# EAGLE board schema_carte_US (EAGLE 6.4)
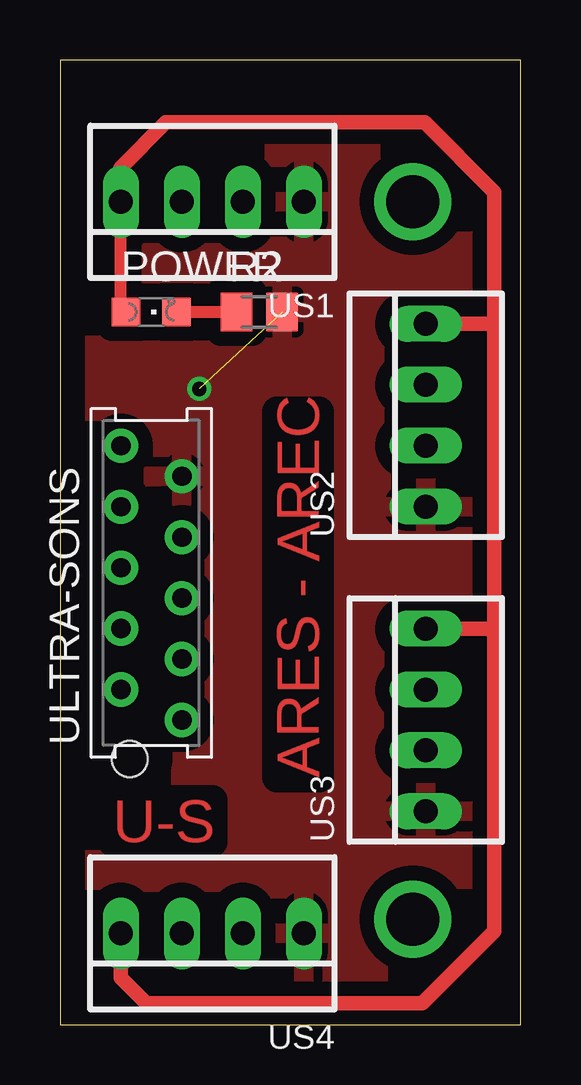
[diagram p0: board, top side]
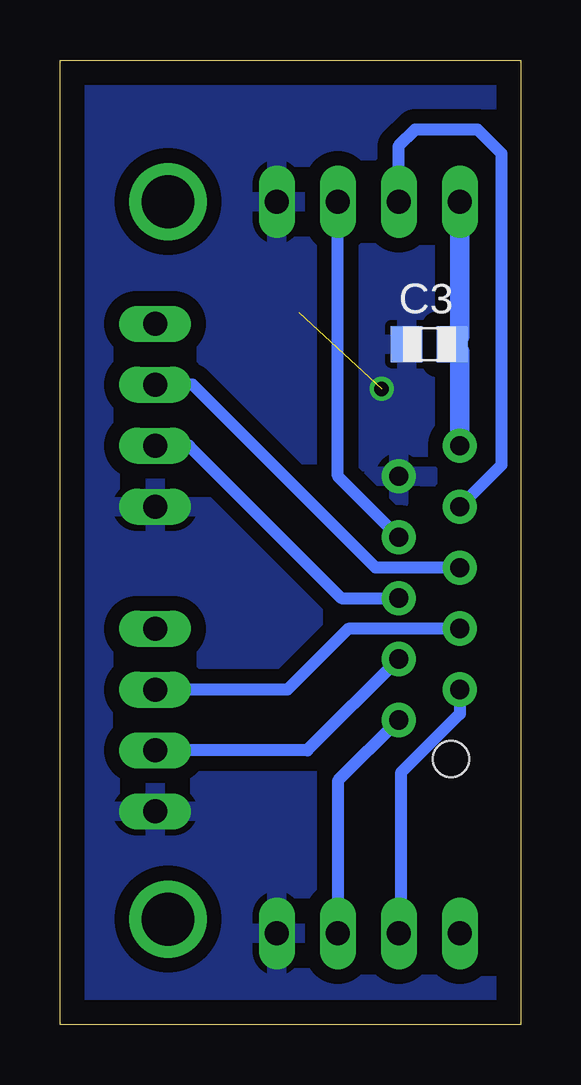
[diagram p1: board, bottom side, seen from below]

Size 19.2 x 40.2 mm. Coordinates in mm from the lower left corner, seen from the top.
Outline: 0,0 19.2,0 19.2,40.2 0,40.2 0,0
Copper layers (1*16): Top 0.035mm / dielectric 1.5mm / Bottom 0.035mm
Design rules "default": minimum track width 10mil, minimum drill 24mil, track to track 8mil, track to pad 8mil, pad to pad 8mil, via to via 8mil, smd to smd 8mil, copper to edge 40mil, drill to drill 8mil, minimum pad ring 10mil, minimum via ring 8mil, stop-mask expansion 4mil, vias tented up to drill 0mil, thermal gap 10mil

## Footprints (pad centres in the part's own frame; a part is rotated, then mirrored left to right if it is on the bottom)
C0805 = smd 1.3 x 1.5: 1 -0.95,0; 2 0.95,0
CHIPLED_0805 = smd 1.2 x 1.2: A 0,-1.05; C 0,1.05
M0805 = smd 1.3 x 1.6: 1 -0.95,0; 2 0.95,0
AMP-215079-10 = drill 0.8 pad 1.422: 1 0,-1.27; 2 1.27,1.27; 3 2.54,-1.27; 4 3.81,1.27; 5 5.08,-1.27; 6 6.35,1.27; 7 7.62,-1.27; 8 8.89,1.27; 9 10.16,-1.27; 10 11.43,1.27 | hole 1.5: -1.62,0.905
22-23-2041 = drill 1 long: 1 -3.81,0; 2 -1.27,0; 3 1.27,0; 4 3.81,0

## Placement (x,y rotation side)
C3  100nF  [C0805]  3.81,28.36 0 bottom
POWER  [CHIPLED_0805]  3.8,29.7 270 top
R2  1k  [M0805]  8.3,29.7 0 top
ULTRA-SONS  [AMP-215079-10]  3.81,12.7 90 top
US1  22-23-2041  [22-23-2041]  6.35,34.29 180 top
US2  22-23-2041  [22-23-2041]  15.24,25.4 90 top
US3  22-23-2041  [22-23-2041]  15.24,12.7 90 top
US4  22-23-2041  [22-23-2041]  6.35,3.81 180 top

## Library data of the parts
C3 R2 = rcl
POWER = led
ULTRA-SONS = jt-con-micromatch
US1-US4 = con-molex; MF: MOLEX; MPN: 22-23-2041; OC_FARNELL: 1462920; OC_NEWARK: 38C0355

## Nets
+5V: C3.2 POWER.A ULTRA-SONS.10 US1.4 US2.4 US3.4 US4.4
E1: ULTRA-SONS.7 US1.2
E2: ULTRA-SONS.5 US2.2
E3: ULTRA-SONS.3 US3.2
E4: ULTRA-SONS.1 US4.2
GND: C3.1 R2.2 ULTRA-SONS.9 US1.1 US2.1 US3.1 US4.1
N$2: POWER.C R2.1
T1: ULTRA-SONS.8 US1.3
T2: ULTRA-SONS.6 US2.3
T3: ULTRA-SONS.4 US3.3
T4: ULTRA-SONS.2 US4.3

## Tracks (layer width: path | path; a pad name or v marks a point on that pad's centre or on a via)
+5V
  Top 0.5: POWER.A 2.54,29.7 US1.4
  Top 0.6: US4.4 2.54,1.96 3.6,0.9 15.1,0.9 18.1,3.9 18.1,16.3 | 18.1,16.3 18.1,29.2 | 18.1,29.2 18.1,34.7 15.2,37.6 4.4,37.6 2.5,35.7 2.5,34.33 US1.4 | US2.4 18.09,29.21 18.1,29.2 | US3.4 17.89,16.51 18.1,16.3
  Bottom 0.813: ULTRA-SONS.10 2.54,28.04 C3.2 2.54,28.68 US1.4
E1
  Bottom 0.5: ULTRA-SONS.7 7.62,22.86 US1.2
E2
  Bottom 0.5: US2.2 13.83,24.13 7.48,17.78 ULTRA-SONS.5
E3
  Bottom 0.5: ULTRA-SONS.3 8.89,11.43 US3.2
E4
  Bottom 0.5: ULTRA-SONS.1 7.62,10.16 US4.2
GND  (via drill 0.6)  (1 unrouted)
  other vias: 5.8,26.5
  pour Bottom (isolate 0.61): 0.2,39.7 18.9,39.7 18.9,0.1 0.2,0.1
  pour Top (isolate 0.61): 0.2,39.7 18.9,39.7 18.9,0.1 0.2,0.1
N$1  (via drill 2.2)
  other vias: 14.7,4.4
N$2
  Top 0.5: R2.1 POWER.C
N$3  (via drill 2.2)
  other vias: 14.7,34.3
T1
  Bottom 0.5: ULTRA-SONS.8 0.8,23.33 0.8,36.3 1.8,37.3 4.4,37.3 5.1,36.6 5.1,34.31 US1.3
T2
  Bottom 0.5: ULTRA-SONS.6 6.05,19.05 13.67,26.67 US2.3
T3
  Bottom 0.5: ULTRA-SONS.4 7.2,16.5 9.73,13.97 US3.3
T4
  Bottom 0.5: ULTRA-SONS.2 2.54,12.96 5,10.5 5,3.89 US4.3

## Text on the board
Top: ARES - AREC | U-S